# Altium PCB Adafruit BNO055.PcbDoc
Units mm, origin at the board's own origin, x right, y up, seen from the top; angles counter-clockwise.
Board outline 26.67 x 20.32 mm, 2 copper layers (Top, Bottom); 31 components, 16 nets, 89 pads, 15 vias.
Unrouted connection lines stored in the file: 1.
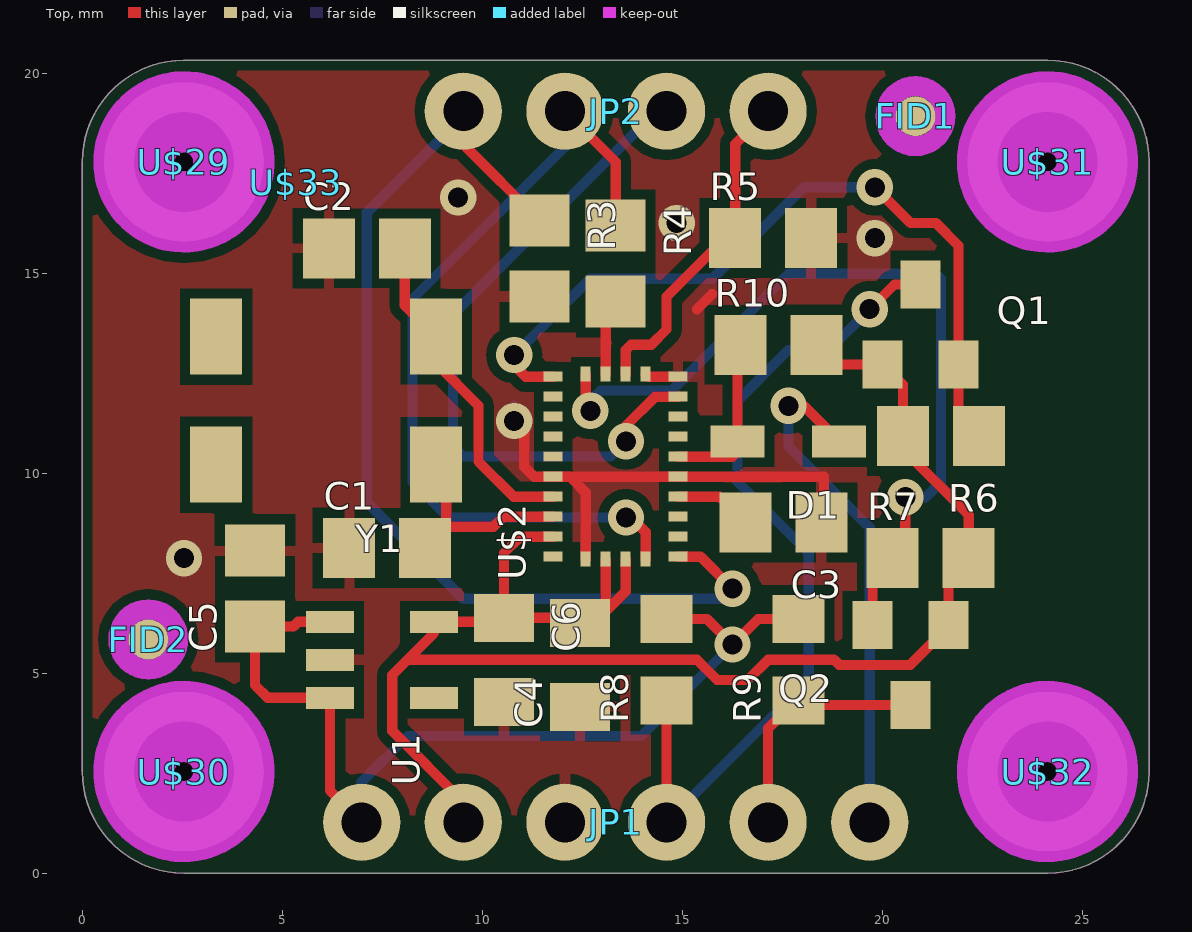
[diagram p0: Top view]
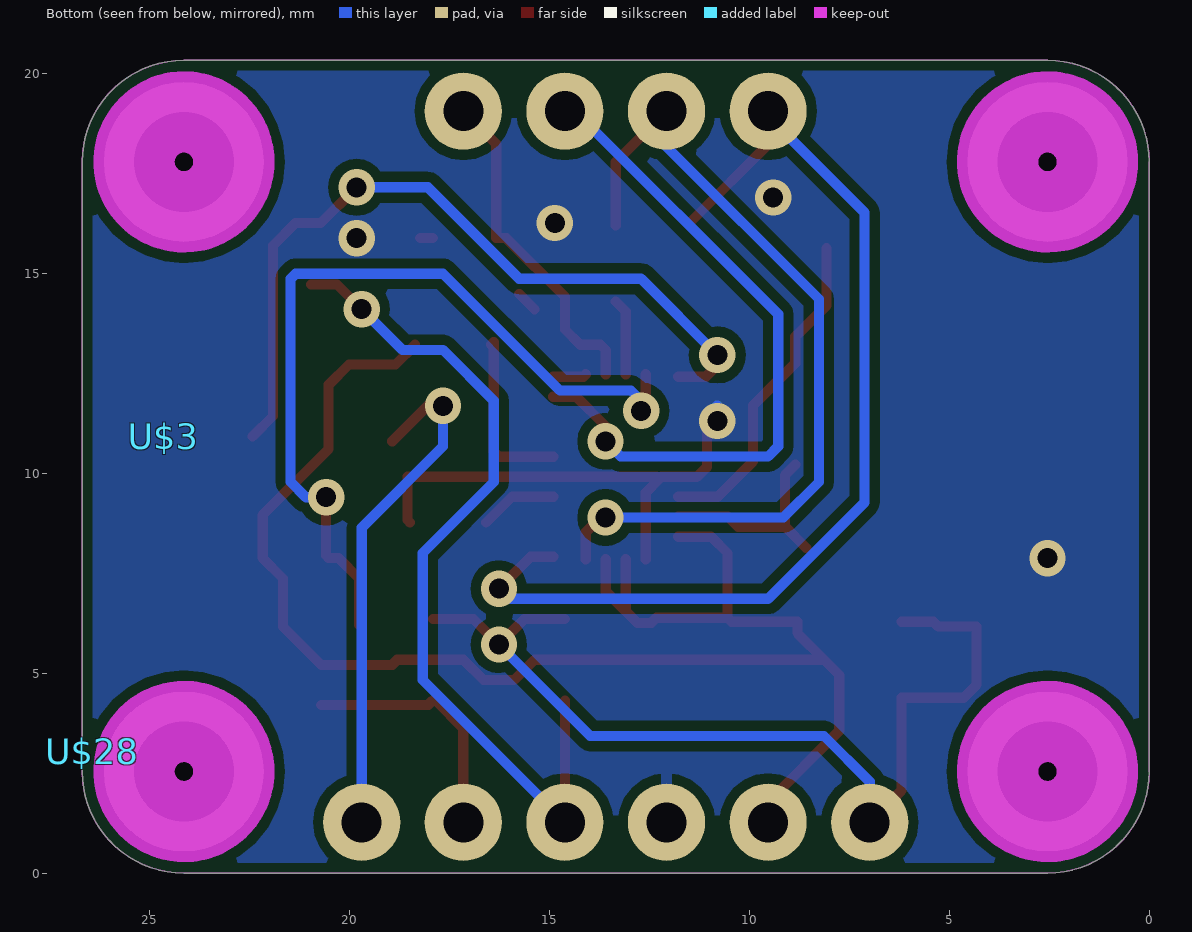
[diagram p1: Bottom view, seen from below]

## Layer stack, top to bottom
Top Solder: solder mask 0.0102, Solder Resist, Dk 3.5
Top: signal copper 0.035
Dielectric 1: dielectric 0.32, FR-4, Dk 4.8
Bottom: signal copper 0.035
Bottom Solder: solder mask 0.0102, Solder Resist, Dk 3.5

## Board outline
0,17.78 cw(c2.54,17.78) 2.54,20.32 24.13,20.32 cw(c24.13,17.78) 26.67,17.78 26.67,2.54 cw(c24.13,2.54) 24.13,0 2.54,0 cw(c2.54,2.54) 0,2.54

## Design rules (kind name [scope] priority, off if disabled: settings)
BoardOutlineClearance mdCopperDimension [All] p1: gap=0.254 ignorepadtopadclearanceinfootprint=FALSE except(0: Arc-SplitContinuation Track-SplitContinuation SMDPad-SplitContinuation THPad-SplitContinuation Via-SplitContinuation Fill-SplitContinuation Poly-SplitContinuation Region-SplitContinuation Text-SplitContinuation)
Clearance Clearance_for_PolygonClass_Isolate_10 [InPolygonClass('Isolate_10') vs IsArc Or IsTrack Or IsPad Or IsVia Or IsFill Or IsRegion Or IsText] p1: gap=0.254 ignorepadtopadclearanceinfootprint=FALSE
Clearance "Clearance (Same Net)" [All] p2: gap=0.203 ignorepadtopadclearanceinfootprint=FALSE
Clearance [All] p3: gap=0.203 ignorepadtopadclearanceinfootprint=FALSE
HoleSize [All] p1: absolutevalues=TRUE maxlimit=2540 minlimit=0.394 maxpercent=80.000 minpercent=20.000
HoleToHoleClearance mdDrill [All] p1: gap=0.203 allowstackedmicrovias=TRUE
MinimumSolderMaskSliver [All] p1 off: minsoldermaskwidth=0.254
PasteMaskExpansion Expansion_SMDPaste_OFF [InPadClass('SMDPaste_OFF')] p1: expansion=0
PasteMaskExpansion mlMinCreamFrame [All] p2: expansion=0
PolygonConnect PolygonConnect_For_PolygonThermal_ON_Width100000_Gap100000 [InPolygonClass('PolygonThermal_ON_Width100000_Gap100000') vs Not IsVia] p1: connectstyle=Relief reliefconductorwidth=0.254 reliefentries=4 polygonreliefangle="90 Angle" airgapwidth=0.254
PolygonConnect ThermalVias [IsVia] p2: connectstyle=Direct reliefconductorwidth=0.254 reliefentries=4 polygonreliefangle="90 Angle" airgapwidth=0.254
PolygonConnect [All] p3: connectstyle=Relief reliefconductorwidth=0.254 reliefentries=4 polygonreliefangle="90 Angle" airgapwidth=0.254
RoutingVias [All] p1: holewidth=0.394 width=0.8 viastyle="Through Hole" minholewidth=0.394 minwidth=0.8 maxholewidth=2.54 maxwidth=2.54
SolderMaskExpansion mlMinStopFrame [All] p1: expansion=0.051 istentingtop=FALSE
Width [All] p1: maxlimit=254 minlimit=0.203 preferedwidth=0.203
26 further rules are at their usual default settings.

## Classes and differential pairs
polygon class PolygonThermal_ON_Width100000_Gap100000: Polygon_1_Net_GND Polygon_2_Net_GND
polygon class Isolate_10: Polygon_1_Net_GND Polygon_2_Net_GND
pad class SMDPaste_OFF: FID1-1 FID2-1

## Components (designator, comment, footprint, x,y, rotation, side; value= is the part's Value field where it differs from the comment)
C1 "22pF" 0805-NO 7.62,8.128 r0 top
C2 "22pF" 0805-NO 7.112,15.621 r0 top
C3 "0.1uF" 0805-NO 17.526,8.763 r180 top
C4 "0.1uF" 0805_10MGAP 12.446,5.207 r90 top
C5 "10uF" 0805-NO 4.318,7.112 r90 top
C6 "10uF" 0805_10MGAP 10.541,5.334 r270 top
D1 "1n4148" SOD-323 17.653,10.795 r180 top
FID1 "" FIDUCIAL_1MM 20.828,18.923 r0 top
FID2 "" FIDUCIAL_1MM 1.651,5.842 r0 top
JP1 "" 1X06_ROUND_76 13.335,1.27 r0 top
JP2 "" 1X04_ROUND_76 13.335,19.05 r0 top
Q1 "BSS138" SOT23-WIDE 20.955,13.716 r0 top
Q2 "BSS138" SOT23-WIDE 20.701,5.207 r180 top
R3 "10K" 0805-NO 11.43,15.367 r270 top
R4 "10K" 0805-NO 13.335,15.24 r270 top
R5 "10K" 0805-NO 17.272,15.875 r0 top
R6 "10K" 0805-NO 21.463,10.922 r180 top
R7 "10K" 0805-NO 21.209,7.874 r0 top
R8 "10K" _0805MP 14.605,5.334 r90 top
R9 "10K" _0805MP 17.907,5.334 r90 top
R10 "10K" 0805-NO 17.399,13.208 r0 top
U1 "MIC5225-3.3" SOT23-5 7.493,5.334 r270 top
U$2 "BNO055" BNO055 13.335,10.16 r90 top
U$3 "" PCBFEAT-REV-040 24.638,10.922 r180 bottom
U$28 "" ADAFRUIT_TEXT_20MM 26.416,3.048 r180 bottom
U$29 "" MOUNTINGHOLE_2.5_PLATED_THICK 2.54,17.78 r0 top
U$30 "" MOUNTINGHOLE_2.5_PLATED_THICK 2.54,2.54 r0 top
U$31 "" MOUNTINGHOLE_2.5_PLATED_THICK 24.13,17.78 r0 top
U$32 "" MOUNTINGHOLE_2.5_PLATED_THICK 24.13,2.54 r0 top
U$33 "" ADAFRUIT_2.5MM 5.334,17.272 r0 top
Y1 "32.768kHz" CRYSTAL_8X3.8 6.096,11.811 r180 top

## Footprints (in the part's own frame and the unit in brackets; to place one, negate y for a bottom-side part, rotate by r counter-clockwise, add the part's x,y. Pads: shape width x height; smd on the part's side, far side on the other; paste and mask are expansions set on the pad)
1X04_ROUND_76 [mil] "1X04_ROUND_76"
  round 76 hole 39.37: 1(-150,0) 2(-50,0) 3(50,0) 4(150,0)
  body extent -204,-38 188,38, height 150
1X06_ROUND_76 [mil] "1X06_ROUND_76"
  round 76 hole 39.37: 1(-250,0) 2(-150,0) 3(-50,0) 4(50,0) 5(150,0) 6(250,0)
  body extent -304,-38 288,38, height 150
0805-NO [mm] "0805-NO"
  rect 1.3x1.5 smd: 1(-0.95,0) 2(0.95,0)
  body extent -1.6,-0.75 1.6,0.75, height 3.81
0805_10MGAP [mm] "0805_10MGAP"
  rect 1.2x1.5 smd: 1(-1.05,0) 2(1.05,0)
  body extent -1.65,-0.75 1.65,0.75, height 3.81
_0805MP [mil] "_0805MP"
  rect 47.24x51.18 smd: 1(-40,0) 2(40,0)
  body extent -64,-26 64,26, height 150
ADAFRUIT_2.5MM [mm] "ADAFRUIT_2.5MM"
ADAFRUIT_TEXT_20MM [mm] "ADAFRUIT_TEXT_20MM"
BNO055 [mm] "BNO055"
  rect 0.25x0.475 smd: 1(-2.25,1.563) 6(-2.25,-1.563) 7(-1.75,-1.563) 8(-1.25,-1.563) 9(-0.75,-1.563) 10(-0.25,-1.563) 11(0.25,-1.563) 12(0.75,-1.563) 13(1.25,-1.563) 14(1.75,-1.563) 15(2.25,-1.563) 20(2.25,1.563) 21(1.75,1.563) 22(1.25,1.563) 23(0.75,1.563) 24(0.25,1.563) 25(-0.25,1.563) 26(-0.75,1.563) 27(-1.25,1.563) 28(-1.75,1.563)
  rect 0.375x0.25 smd: 2(-2.312,0.75) 3(-2.312,0.25) 4(-2.312,-0.25) 5(-2.312,-0.75) 16(2.312,-0.75) 17(2.312,-0.25) 18(2.312,0.25) 19(2.312,0.75)
  body extent -2.67,-1.97 2.67,1.97, height 3.81
CRYSTAL_8X3.8 [mm] "CRYSTAL_8X3.8"
  rect 1.3x1.9 smd: P$1(-2.75,-1.6) P$2(2.75,-1.6) P$3(2.75,1.6) P$4(-2.75,1.6)
  body extent -4.11,-2.55 4.11,2.55, height 3.81
FIDUCIAL_1MM [mm] "FIDUCIAL_1MM"
  rrect100% 1x1 smd paste+0: 1(0,0)
  Top keep-out lines w0.5: -0.75,0 ccw(c0,0) 0,-0.75 ; -0.75,0 cw(c0,0) 0,0.75 ; -0.75,0 ccw(c0,0) 0,-0.75 ; -0.75,0 cw(c0,0) 0,0.75 ; 0,-0.75 ccw(c0,0) 0.75,0 ; 0,-0.75 ccw(c0,0) 0.75,0 ; 0,0.75 cw(c0,0) 0.75,0 ; 0,0.75 cw(c0,0) 0.75,0
  body extent -1.01,-1.01 1.01,1.01, height 3.81
MOUNTINGHOLE_2.5_PLATED_THICK [mm] "MOUNTINGHOLE_2.5_PLATED_THICK"
  round 4 hole 2.5: P$1(0,0)
  Top keep-out circle w2.032: c0,0 r1.25
  Top keep-out circle w2.032: c0,0 r1.25
  Bottom keep-out circle w2.032: c0,0 r1.25
  Bottom keep-out circle w2.032: c0,0 r1.25
  body extent -2.28,-2.28 2.28,2.28, height 3.81
PCBFEAT-REV-040 [mm] "PCBFEAT-REV-040"
SOD-323 [mm] "SOD-323"
  rect 1.35x0.8 smd: A(1.27,0) C(-1.27,0)
  body extent -1.95,-0.81 1.95,0.81, height 3.81
SOT23-5 [mm] "SOT23-5"
  rect 0.55x1.2 smd: 1(-0.95,-1.3) 2(0,-1.3) 3(0.95,-1.3) 4(0.95,1.3) 5(-0.95,1.3)
  body extent -1.53,-1.9 1.53,1.9, height 3.81
SOT23-WIDE [mm] "SOT23-WIDE"
  rect 1x1.2 smd: 1(-0.95,-1) 2(0.95,-1) 3(0,1)
  body extent -1.68,-1.6 1.68,1.6, height 3.81

## Part data
C1 C2 C3 C5 R3 R4 R5 R6 R7 R10: library part 0805-NO, PackageName=0805-NO
C4 C6: library part 0805_10MGAP, PackageName=0805_10MGAP
D1: library part SOD-323, PackageName=SOD-323
FID1 FID2: library part FIDUCIAL_1MM, PackageName=FIDUCIAL_1MM
JP1: library part 1X06_ROUND_76, PackageName=1X06_ROUND_76
JP2: library part 1X04_ROUND_76, PackageName=1X04_ROUND_76
Q1 Q2: library part SOT23-WIDE, PackageName=SOT23-WIDE
R8 R9: library part _0805MP, PackageName=_0805MP
U1: library part SOT23-5, PackageName=SOT23-5
U$3: library part PCBFEAT-REV-040, PackageName=PCBFEAT-REV-040
U$28: library part ADAFRUIT_TEXT_20MM, PackageName=ADAFRUIT_TEXT_20MM
U$29 U$30 U$31 U$32: library part MOUNTINGHOLE_2.5_PLATED_THICK, PackageName=MOUNTINGHOLE_2.5_PLATED_THICK
U$33: library part ADAFRUIT_2.5MM, PackageName=ADAFRUIT_2.5MM
Y1: library part CRYSTAL_8X3.8, PackageName=CRYSTAL_8X3.8
U$2: PackageName=BNO055

## Via types
v1: diameter 0.907/0.907 (per signal layer), hole 0.5, Top to Bottom, 15 vias

## Nets (pads, with @x,y where several pads share a name; then routed paths per layer and width w, separated by ;. In a path a pad name is that pad's centre, name@x,y a point inside that pad or via, vN(x,y) a via of type N, cw(c..) or ccw(c..) an arc to the next point about the centre after c; other vN are vias at no path point)
3.3V: C4.2 C6.1 JP1.2 Q1.1 Q2.1 R6.2 R7.2 R10.2 U1.5 U$2.3 U$2.4 U$2.28 | length 40.6
  Top w0.254: JP1.2 9.525,1.778 7.747,3.556 7.747,4.953 8.128,5.334 ; U$2.28 10.95,8.41 10.541,8.001 C6.1 ; U$2.3 C4.2@13.085,6.546 ; U$2.4 13.585,7.046 C4.2@13.085,6.546 ; R10.2 18.841,12.716 Q1.1 20.513,12.208 R6.2 20.513,10.602 22.159,8.956 R7.2 ; R7.2@22.032,7.747 R7.2 ; 8.128,5.334 15.367,5.334 15.875,4.826 16.637,4.826 17.145,5.334 18.796,5.334 18.923,5.207 20.701,5.207 21.651,6.157 Q2.1 21.651,7.366 R7.2 ; 8.128,5.334 8.793,5.999 U1.5 10.441,6.284 C6.1 ; C6.1 12.319,6.384 C4.2 12.796,6.257 C4.2@13.085,6.546
5.0V: C5.1 JP1.1 R8.2 R9.2 U1.1 U1.3 | length 24.4
  Top w0.254: U1.1 5.395,6.284 5.273,6.162 C5.1 4.318,4.699 4.633,4.384 U1.3 6.193,2.062 JP1.1 ; R8.2 15.621,6.35 v1(16.256,5.715) 16.891,6.35 R9.2
  Bottom w0.254: JP1.1 6.985,2.286 8.128,3.429 13.97,3.429 v1(16.256,5.715)
GND: C1.1 C2.1 C3.1 C4.1 C5.2 C6.2 JP1.3 R3.2 R4.2 R5.2 U1.2 U$2.2 U$2.10 U$2.15 U$2.16 U$2.18 U$2.25 | length 15.8
  Top w0.254: v1@11.049,11.176 11.049,10.16 11.299,9.91 U$2.25 12.188,9.91 12.255,9.842 ; U$2.2 12.585,9.513 12.255,9.842 ; U$2.18 13.085,14.04 R4.2 ; U$2.16 14.148,12.41 U$2.15 ; 15.367,14.097 15.748,14.478 ; R5.2@17.907,15.875 R5.2 ; C3.1 18.542,8.829 18.542,9.906 18.538,9.91 U$2.10 12.323,9.91 12.255,9.842
  Bottom w0.254: v1@10.795,11.684 v1@10.922,11.557
  other v1: 2.54,7.874 10.795,11.303 19.812,15.875 14.859,16.256 9.398,16.891
I2CADDR_3V: JP2.4 R5.1 U$2.17 | length 8.5
  Top w0.254: U$2.17 13.585,13.077 13.716,13.208 14.224,13.208 14.605,13.589 14.605,14.412 16.068,15.875 R5.1 16.322,18.227 JP2.4
INT_3V: JP2.3 U$2.14 | length 17.3
  Top w0.254: v1(13.589,10.795) 13.589,11.176 14.323,11.91 U$2.14
  Bottom w0.254: v1(13.589,10.795) 13.208,10.414 9.525,10.414 9.271,10.668 9.271,13.97 14.351,19.05 JP2.3
N$1: C1.2 U$2.27 Y1.P$4 | length 5.2
  Top w0.254: C1.2 C1.2@9.1,8.658 ; Y1.P$4 9.1,9.957 C1.2@9.1,8.658 ; U$2.27 10.528,8.91 10.276,8.658 C1.2@9.1,8.658
N$2: C2.2 U$2.26 Y1.P$1 | length 8.3
  Top w0.254: C2.2 8.062,14.195 Y1.P$1 8.846,12.744 9.906,11.684 9.906,10.287 10.783,9.41 U$2.26
N$3: C3.2 U$2.9 | length 1.9
  Top w0.254: U$2.9 15.929,9.41 C3.2
NRESET_3V: D1.A R10.1 U$2.11 | length 4.4
  Top w0.254: U$2.11 16.252,10.41 16.383,10.541 D1.A 16.383,13.274 R10.1
PS0_3V: JP2.1 R3.1 U$2.6 | length 26.2
  Top w0.254: JP2.1 9.525,18.222 R3.1 ; U$2.6 15.458,7.91 v1(16.256,7.112)
  Bottom w0.254: JP2.1 9.525,18.923 7.112,16.51 7.112,9.271 9.525,6.858 16.002,6.858 v1(16.256,7.112)
PS1_3V: JP2.2 R4.1 U$2.5 | length 21.3
  Top w0.254: JP2.2 13.335,17.78 R4.1 ; v1(13.589,8.89) 13.716,8.89 14.085,8.521 U$2.5
  Bottom w0.254: JP2.2 12.065,18.161 8.255,14.351 8.255,9.779 9.144,8.89 v1(13.589,8.89)
RST_5V: D1.C JP1.6 | length 12.9
  Top w0.254: v1(17.653,11.684) 18.034,11.684 D1.C
  Bottom w0.254: v1(17.653,11.684) 17.653,10.668 19.685,8.636 JP1.6
SCL_3V: Q2.2 R7.1 U$2.19 | length 21.2
  Top w0.254: U$2.19 12.585,11.672 v1(12.7,11.557) ; Q2.2 19.751,7.366 R7.1 20.508,7.874 20.574,7.94 v1(20.574,9.398)
  Bottom w0.254: v1(12.7,11.557) 12.7,11.811 12.954,12.065 14.732,12.065 17.653,14.986 21.336,14.986 21.463,14.859 21.463,9.779 21.082,9.398 v1(20.574,9.398)
SCL_5V: JP1.5 Q2.3 R9.1 | length 6.2
  Top w0.254: JP1.5 17.145,3.622 17.841,4.318 R9.1 18.018,4.207 Q2.3
SDA_3V: Q1.2 R6.1 U$2.20 | length 19.8
  Top w0.254: v1(10.795,12.954) 10.795,12.7 11.085,12.41 U$2.20 ; v1(19.812,17.145) 20.701,16.256 21.336,16.256 21.905,15.687 Q1.2 21.905,11.43 R6.1
  Bottom w0.254: v1(10.795,12.954) 12.7,14.859 15.748,14.859 18.034,17.145 v1(19.812,17.145)
SDA_5V: JP1.4 Q1.3 R8.1 | length 21.6
  Top w0.254: JP1.4 R8.1 ; v1(19.685,14.097) 20.304,14.716 Q1.3
  Bottom w0.254: JP1.4 18.161,4.826 18.161,8.001 16.383,9.779 16.383,11.811 17.653,13.081 18.669,13.081 v1(19.685,14.097)
pads on no net: FID1.1 FID2.1 U1.4 U$2.1 U$2.7 U$2.8 U$2.12 U$2.13 U$2.21 U$2.22 U$2.23 U$2.24 U$29.P$1 U$30.P$1 U$31.P$1 U$32.P$1 Y1.P$2 Y1.P$3

## Polygon pours and split planes (outlines as drawn)
GND on Bottom "Polygon_1_Net_GND" (solid, remove dead copper, pour order 1): -0.127,20.447 26.797,20.447 26.797,-0.127 -0.127,-0.127
GND on Top "Polygon_2_Net_GND" (solid, remove dead copper, pour order 0): -0.127,20.447 26.797,20.447 26.797,-0.127 -0.127,-0.127

## Keep-outs
Keep-Out Layer:
  the board outline again, w0

## Silkscreen, mask and mechanical layers (free items; w line width, h text height)
Dimension:
  the board outline again, w0
tPlace:
  text "INT" at 13.812,17.146 h0.69
  text "PS0" at 8.516,17.098 h0.69
  text "PS1" at 11.171,17.098 h0.69
  text "ADR" at 16.277,17.098 h0.69
  text "BNO055" at 1.719,7.63 h1.08 r90
  text "Orientation" at 24.411,5.994 h0.86 r90
  text "9-Axis Abs." at 25.935,5.994 h0.86 r90
  text "Vin" at 6.128,2.493 h0.69
  text "3vo" at 8.543,2.493 h0.69
  text "GND" at 11.183,2.493 h0.69
  text "SDA" at 13.723,2.493 h0.69
  text "SCL" at 16.263,2.493 h0.69
  text "RST" at 18.843,2.493 h0.69
bPlace:
  text "BNO055" at 18.175,15.761 h1.21
  text "Vin:3-5V DC, 3V logic" at 24.765,14.197 h0.86
  text "SDA/SCL/RST: 5V ok" at 24.765,12.673 h0.86
  text "3-Axis Accel+Gyro+Mag" at 19.177,10.895 h0.86
  text "w/Quaternion, Euler" at 19.177,9.371 h0.86
  text "Heading, etc. I2C Out" at 19.177,7.847 h0.86

## Dimensions
13.335,1.27 to 13.335,19.05 on tFinish
2.54,2.54 to 2.54,17.78 on tFinish
5.461,0 to 5.842,20.32 on tFinish
2.54,17.78 to 24.13,17.78 on tFinish
0,14.097 to 26.67,11.43 on tFinish

## Text inside footprints (layer, text, board x,y; h text height)
U$3: tPlace ">REV" at 24.994,10.414 h0.86